# Altium PCB in.PcbDoc
Units mil, origin at the board's own origin, x right, y up, seen from the top; angles counter-clockwise.
Board outline 8000 x 11330 mil, 2 copper layers (Top Layer, Bottom Layer); 65 components, 0 nets, 187 pads, 8 vias.
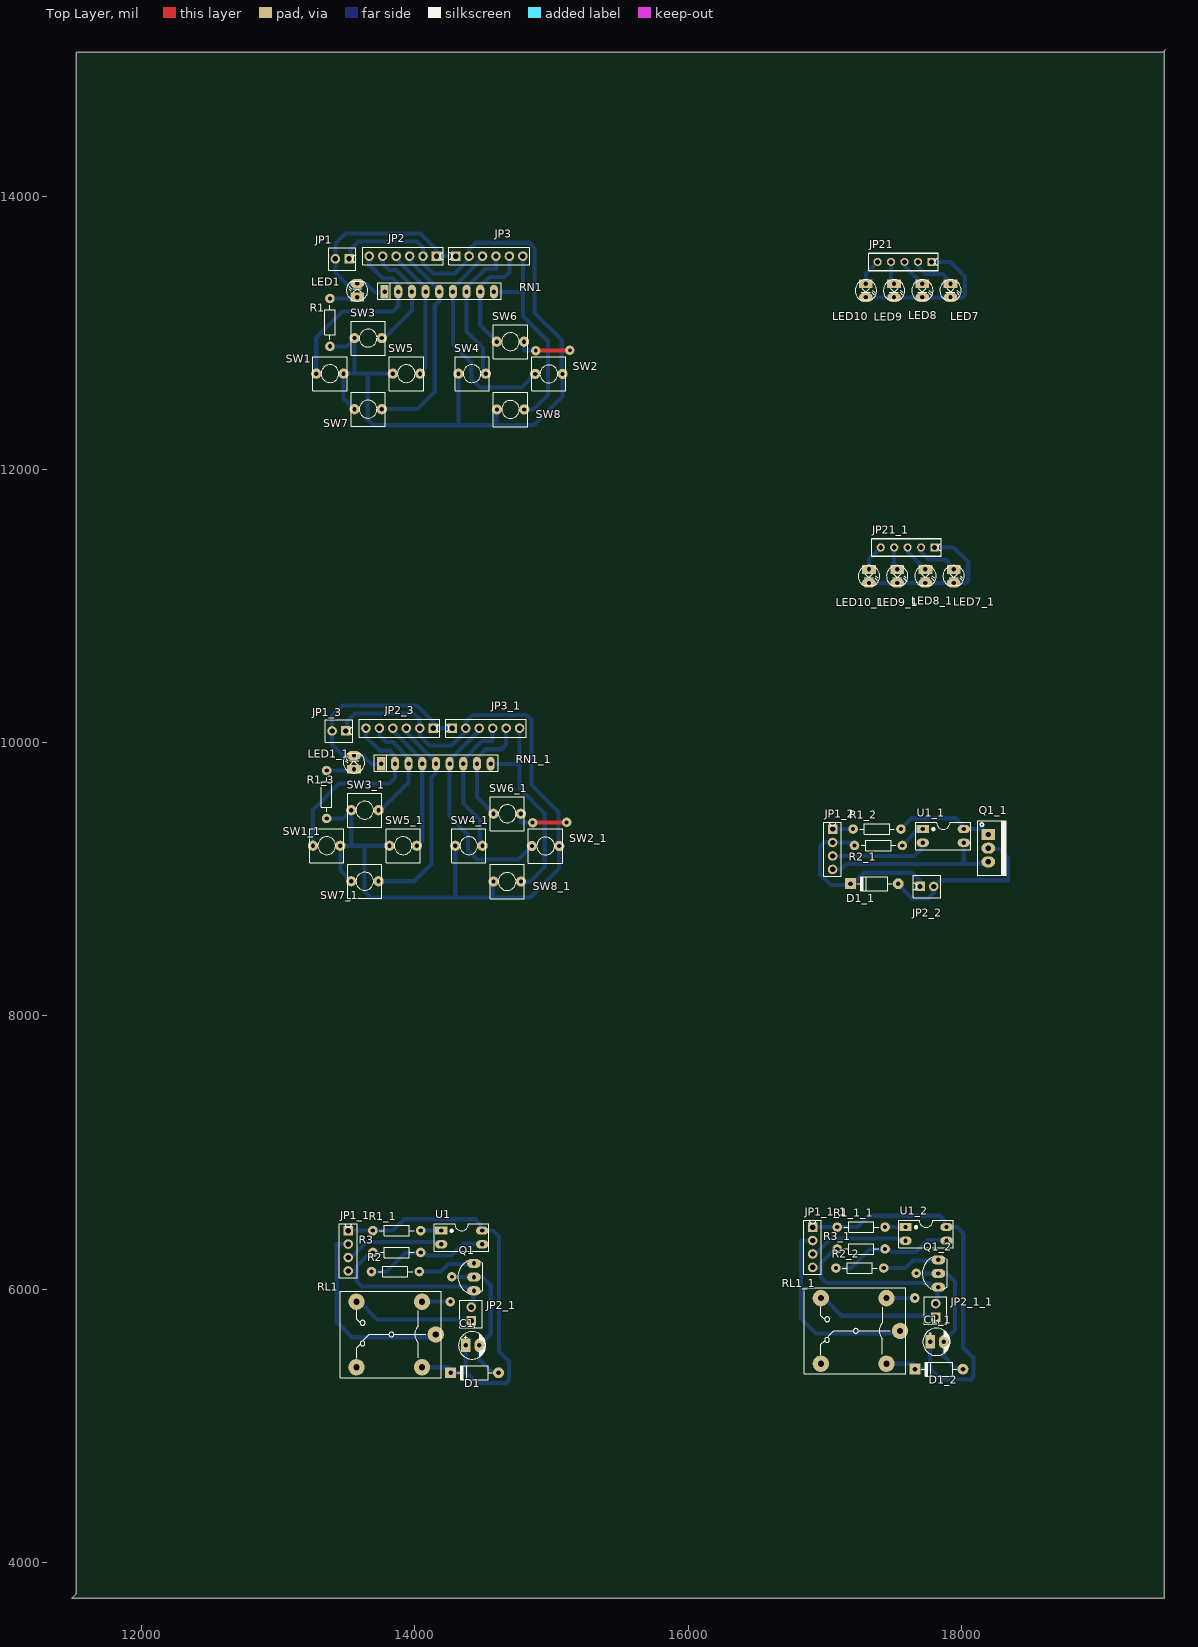
[diagram p0: Top Layer view]
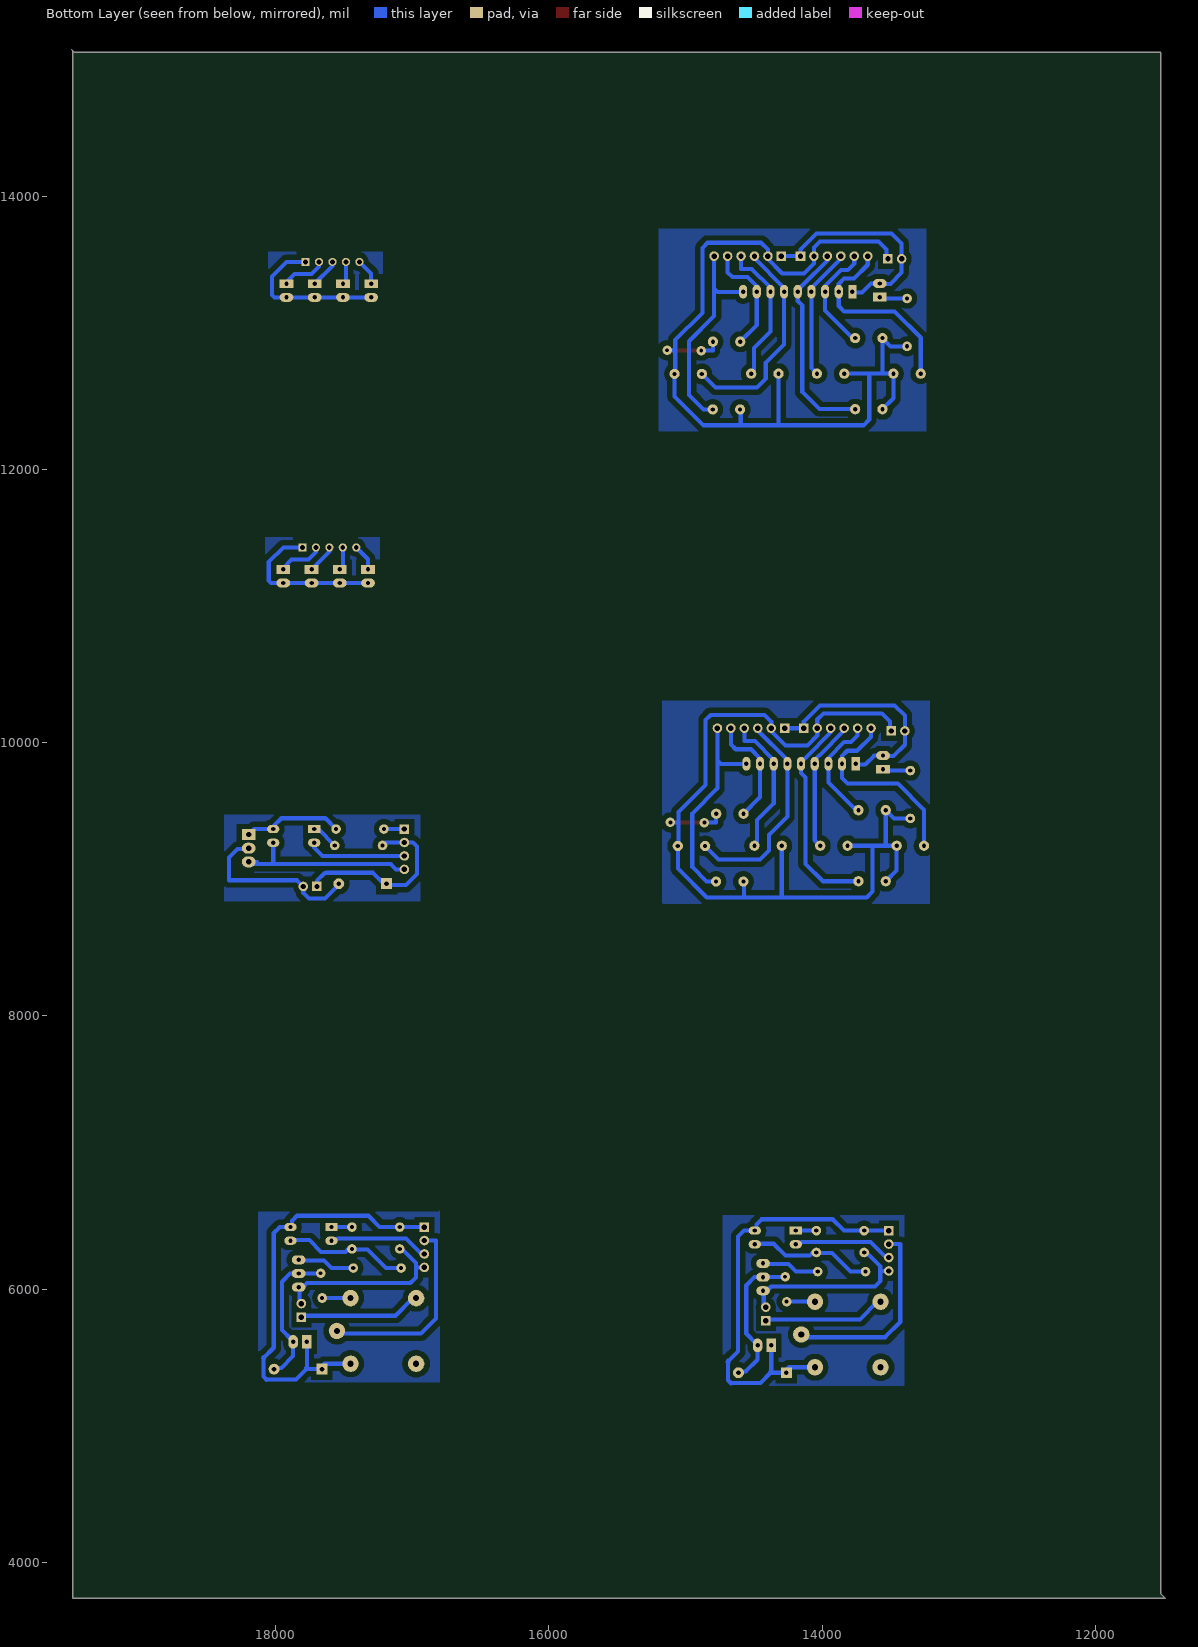
[diagram p1: Bottom Layer view, seen from below]

## Layer stack, top to bottom
Top Layer: signal copper 1.4
Dielectric: dielectric 12.6, FR-4, Dk 4.8
Bottom Layer: signal copper 1.4

## Board outline
11525,15055 19475,15055 19490,15070 19485,15065 19485,3740 11490,3740 11520,3770 11520,15045

## Design rules (kind name [scope] priority, off if disabled: settings)
Clearance [All] p1: gap=40
PolygonConnect [All] p1: connectstyle=Relief reliefconductorwidth=10 reliefentries=4 polygonreliefangle="90 Angle"
RoutingVias [All] p1: holewidth=28 width=50 viastyle="Through Hole" minholewidth=28 minwidth=50 maxholewidth=28 maxwidth=50
SilkscreenOverComponentPads [All] p1: minsilkscreentomaskgap=10
SolderMaskExpansion [All] p1: expansion=4
Width [All] p1: maxlimit=30 minlimit=30 preferedwidth=30
27 further rules are at their usual default settings.

## Components (designator, comment, footprint, x,y, rotation, side; value= is the part's Value field where it differs from the comment)
C1 "10uF" CP1/2 14372,5589 r0 top
C1_1 "10uF" CP1/2 17771,5615 r0 top (schematic designator C1)
D1 "1N4007" D1A 14612,5389 r0 top
D1_1 "1N4007" D1A 17537,8968 r0 top (schematic designator D1)
D1_2 "1N4007" D1A 18011,5415 r0 top (schematic designator D1)
JP1 "JP2" CON2 13518,13541 r270 top
JP1_1 "JP4" CON4 13512,6429 r0 top (schematic designator JP1)
JP1_1_1 "JP4" CON4 16911,6455 r0 top (schematic designator JP1)
JP1_2 "JP4" CON4 17057,9368 r0 top (schematic designator JP1)
JP1_3 "JP2" CON2 13494,10086 r270 top (schematic designator JP1)
JP2 "JP6" CON6#1 14158,13561 r270 top
JP2_1 "JP2" CON2 14412,5769 r180 top (schematic designator JP2)
JP2_1_1 "JP2" CON2 17811,5795 r180 top (schematic designator JP2)
JP2_2 "JP2" CON2 17697,8948 r90 top (schematic designator JP2)
JP2_3 "JP6" CON6#1 14134,10106 r270 top (schematic designator JP2)
JP3 "JP6" CON6#2 14298,13561 r270 top
JP3_1 "JP6" CON6#2 14274,10106 r270 top (schematic designator JP3)
JP21 "JP5" CON5 17780,13519 r270 top
JP21_1 "JP5" CON5 17803,11429 r270 top (schematic designator JP21)
LED1 "LED" LED-3 13578,13261 r90 top
LED1_1 "LED" LED-3 13554,9806 r90 top (schematic designator LED1)
LED7 "LED" LED-3 17920,13359 r270 top
LED7_1 "LED" LED-3 17943,11269 r270 top (schematic designator LED7)
LED8 "LED" LED-3 17713.33,13359 r270 top
LED8_1 "LED" LED-3 17736.33,11269 r270 top (schematic designator LED8)
LED9 "LED" LED-3 17506.67,13359 r270 top
LED9_1 "LED" LED-3 17529.67,11269 r270 top (schematic designator LED9)
LED10 "LED" LED-3 17300,13359 r270 top
LED10_1 "LED" LED-3 17323,11269 r270 top (schematic designator LED10)
Q1 "C1815" QTO-92 14432,6089 r90 top
Q1_1 "IRF840" QTO-220 18197,9328 r270 top (schematic designator Q1)
Q1_2 "C1815" QTO-92 17831,6115 r90 top (schematic designator Q1)
R1 "1k" R1/4W 13378,12901 r90 top
R1_1 "220" R1/4W 13692,6429 r0 top (schematic designator R1)
R1_1_1 "220" R1/4W 17091,6455 r0 top (schematic designator R1)
R1_2 "10K" R1/4W 17557,9368 r180 top (schematic designator R1)
R1_3 "1k" R1/4W 13354,9446 r90 top (schematic designator R1)
R2 "1K" R1/4W 14032,6129 r180 top
R2_1 "220" R1/4W 17217,9248 r0 top (schematic designator R2)
R2_2 "1K" R1/4W 17431,6155 r180 top (schematic designator R2)
R3 "1K" R1/4W 13692,6269 r0 top
R3_1 "1K" R1/4W 17091,6295 r0 top (schematic designator R3)
RL1 "Relay 10A/12V" RL_SPDT_10A 14152,5669 r180 top
RL1_1 "Relay 10A/12V" RL_SPDT_10A 17551,5695 r180 top (schematic designator RL1)
RN1 "10K" RN8 13778,13301 r0 top
RN1_1 "10K" RN8 13754,9846 r0 top (schematic designator RN1)
SW1 "SW" SW2 13478,12701 r180 top
SW1_1 "SW" SW2 13454,9246 r180 top (schematic designator SW1)
SW2 "SW" SW2 15080,12699 r180 top
SW2_1 "SW" SW2 15056,9244 r180 top (schematic designator SW2)
SW3 "SW" SW2 13558,12961 r0 top
SW3_1 "SW" SW2 13534,9506 r0 top (schematic designator SW3)
SW4 "SW" SW2 14319,12701 r0 top
SW4_1 "SW" SW2 14295,9246 r0 top (schematic designator SW4)
SW5 "SW" SW2 13838,12701 r0 top
SW5_1 "SW" SW2 13814,9246 r0 top (schematic designator SW5)
SW6 "SW" SW2 14799,12935 r180 top
SW6_1 "SW" SW2 14775,9480 r180 top (schematic designator SW6)
SW7 "SW" SW2 13558,12441 r0 top
SW7_1 "SW" SW2 13534,8986 r0 top (schematic designator SW7)
SW8 "SW" SW2 14600,12439 r0 top
SW8_1 "SW" SW2 14576,8984 r0 top (schematic designator SW8)
U1 "PC817" DIP4/W0.3 14192,6429 r270 top
U1_1 "PC817" DIP4/W0.3 17717,9368 r270 top (schematic designator U1)
U1_2 "PC817" DIP4/W0.3 17591,6455 r270 top (schematic designator U1)

## Footprints (in the part's own frame and the unit in brackets; to place one, negate y for a bottom-side part, rotate by r counter-clockwise, add the part's x,y. Pads: shape width x height; smd on the part's side, far side on the other; paste and mask are expansions set on the pad)
CON2 [mil]
  rect 70x70 hole 39.37 unplated: 1(0,0)
  round 70 hole 39.37 unplated: 2(0,-100)
  silkscreen extent -82,-150 82,50
CON4 [mil]
  rect 70x70 hole 39.37 unplated: 1(0,0)
  round 70 hole 39.37 unplated: 2(0,-98.43) 3(0,-196.85) 4(0,-295.28)
  silkscreen extent -64,-344 64,49
CON5 [mil]
  rect 60x60 hole 35: 1(0,0)
  round 60 hole 35: 2(0,-98.42) 3(0,-196.85) 4(0,-295.28) 5(0,-393.7)
  silkscreen extent -64,-460 64,49
CON6#1 [mil]
  rect 70x70 hole 39.37 unplated: 1(0,0)
  round 70 hole 39.37 unplated: 2(0,-98.43) 3(0,-196.85) 4(0,-295.28) 5(0,-393.7) 6(0,-492.13)
  silkscreen extent -64,-541 64,49
CON6#2 [mil]
  rect 70x70 hole 39.37 unplated: 1(0,0)
  round 70 hole 39.37 unplated: 2(0,98.43) 3(0,196.85) 4(0,295.28) 5(0,393.7) 6(0,492.13)
  silkscreen extent -64,-49 64,541
CP1/2 [mil] "Tu hoa < 22uF/16>50V"
  rect 70x100 hole 32: 1(0,0)
  oval 70x100 hole 32: 2(100,0)
  silkscreen extent -53,-100 147,100, body extent -49,-99 149,99, height 287
D1A [mil] "Diode 1A, W 100mil, L 350mil"
  round 80 hole 35: 1(0,0)
  rect 80x80 hole 35: 2(-350,0)
  silkscreen extent -305,-50 -45,50, body extent -386,-33 34,36, height 84
DIP4/W0.3 [mil] "4 PIN, W 300mil, Pin to pin 100mil"
  rect 60x90 hole 31: 1(0,0)
  oval 60x90 hole 31: 2(100,0) 3(100,300) 4(0,300)
  silkscreen extent -50,-50 150,350, body extent -59,-10 159,305, height 170
LED-3 [mil] "LED 2 PIN, 3ly Only colour"
  rect 65x100 hole 32: 1(0,0)
  oval 65x100 hole 32: 2(100,0)
  silkscreen extent -29,-78 118,79, body extent -13,-75 125,75, height 217
QTO-92 [mil] "TO-92"
  oval 66x100 hole 32: 1(-100,0) 2(0,0) 3(100,0)
  silkscreen extent -117,-65 120,118, body extent -109,-66 109,95, height 245
QTO-220 [mil] "TO-220 - 1-2-3"
  rect 80x100 hole 39: 1(0,0)
  oval 80x100 hole 39: 2(100,0) 3(200,0)
  silkscreen extent -100,-76 300,130, body extent -119,-64 322,121, height 755
R1/4W [mil] "R 1/4W, 2 Pin, 350mil"
  round 70 hole 31: 1(0,0) 2(350,0)
  silkscreen extent 48,-38 302,38, body extent -40,-47 386,47, height 111
RL_SPDT_10A [mil] "Relay SPDT, 5 pin, 10A,W 650mil, L 800mil, H 800mil"
  round 120 hole 45: 1(0,0) 2(580,240) 3(580,-240) 4(100,-240) 5(100,240)
  silkscreen extent -40,-315 700,315
RN8 [mil] "R SIP8, 9 Pin"
  rect 60x100 hole 32: 1(0,0)
  oval 60x100 hole 32: 2(100,0) 3(200,0) 4(300,0) 5(400,0) 6(500,0) 7(600,0) 8(700,0) 9(800,0)
  silkscreen extent -50,-55 855,65, body extent -43,-44 843,5, height 259
SW2 [mil] "SW button 2pin, 250x 250 mil"
  round 75 hole 31: 1(0,0) 2(200,0)
  silkscreen extent -25,-125 225,125

## Part data
C1 C1_1: library part CP1, "Cap P  0,1uF < 22uF , 16 - 50V"
D1 D1_1 D1_2: library part D1A, "Diode 1A"
JP1 JP1_3 JP2_1 JP2_1_1 JP2_2: library part Con2, "Connector 2"
JP1_1 JP1_1_1 JP1_2: library part Con4, "Connector 4"
JP2 JP2_3 JP3 JP3_1: library part Con6, "Connector 6"
JP21 JP21_1: library part Con5, "Connector 5"
LED1 LED1_1 LED7 LED7_1 LED8 LED8_1 LED9 LED9_1 LED10 LED10_1: "LED Single colour Green and Red"
Q1 Q1_2: "NPN 600mW, ECB"
Q1_1: "MOSFET N - CHANNEL 500V - 0.75 - 8A - TO-220"
R1 R1_1 R1_1_1 R1_2 R1_3 R2 R2_1 R2_2 R3 R3_1: library part R1/4W, "Resistor 1/4W"
RL1 RL1_1: library part "Relay 1", "Relay SPDT,10A - 12VDC 5 Pin"
RN1 RN1_1: library part RN8, "Resistor 8 (Thanh)"
SW1 SW1_1 SW2 SW2_1 SW3 SW3_1 SW4 SW4_1 SW5 SW5_1 SW6 SW6_1 SW7 SW7_1 SW8 SW8_1: library part SW2, "Switch button 2 pin"
U1 U1_1 U1_2: "Single Opto"

## Via types
v1: diameter 70, hole 28, Top Layer to Bottom Layer, 8 vias

## Nets (pads, with @x,y where several pads share a name; then routed paths per layer and width w, separated by ;. In a path a pad name is that pad's centre, name@x,y a point inside that pad or via, vN(x,y) a via of type N, cw(c..) or ccw(c..) an arc to the next point about the centre after c; other vN are vias at no path point)
pads on no net: C1.1 C1.2 C1_1.1 C1_1.2 D1.1 D1.2 D1_1.1 D1_1.2 D1_2.1 D1_2.2 JP1.1 JP1.2 JP1_1.1 JP1_1.2 JP1_1.3 JP1_1.4 JP1_1_1.1 JP1_1_1.2 JP1_1_1.3 JP1_1_1.4 JP1_2.1 JP1_2.2 JP1_2.3 JP1_2.4 JP1_3.1 JP1_3.2 JP2.1 JP2.2 JP2.3 JP2.4 JP2.5 JP2.6 JP2_1.1 JP2_1.2 JP2_1_1.1 JP2_1_1.2 JP2_2.1 JP2_2.2 JP2_3.1 JP2_3.2 JP2_3.3 JP2_3.4 JP2_3.5 JP2_3.6 JP3.1 JP3.2 JP3.3 JP3.4 JP3.5 JP3.6 JP3_1.1 JP3_1.2 JP3_1.3 JP3_1.4 JP3_1.5 JP3_1.6 JP21.1 JP21.2 JP21.3 JP21.4 JP21.5 JP21_1.1 JP21_1.2 JP21_1.3 JP21_1.4 JP21_1.5 LED1.1 LED1.2 LED1_1.1 LED1_1.2 LED7.1 LED7.2 LED7_1.1 LED7_1.2 LED8.1 LED8.2 LED8_1.1 LED8_1.2 LED9.1 LED9.2 LED9_1.1 LED9_1.2 LED10.1 LED10.2 LED10_1.1 LED10_1.2 Q1.1 Q1.2 Q1.3 Q1_1.1 Q1_1.2 Q1_1.3 Q1_2.1 Q1_2.2 Q1_2.3 R1.1 R1.2 R1_1.1 R1_1.2 R1_1_1.1 R1_1_1.2 R1_2.1 R1_2.2 R1_3.1 R1_3.2 R2.1 R2.2 R2_1.1 R2_1.2 R2_2.1 R2_2.2 R3.1 R3.2 R3_1.1 R3_1.2 RL1.1 RL1.2 RL1.3 RL1.4 RL1.5 RL1_1.1 RL1_1.2 RL1_1.3 RL1_1.4 RL1_1.5 RN1.1 RN1.2 RN1.3 RN1.4 RN1.5 RN1.6 RN1.7 RN1.8 RN1.9 RN1_1.1 RN1_1.2 RN1_1.3 RN1_1.4 RN1_1.5 RN1_1.6 RN1_1.7 RN1_1.8 RN1_1.9 SW1.1 SW1.2 SW1_1.1 SW1_1.2 SW2.1 SW2.2 SW2_1.1 SW2_1.2 SW3.1 SW3.2 SW3_1.1 SW3_1.2 SW4.1 SW4.2 SW4_1.1 SW4_1.2 SW5.1 SW5.2 SW5_1.1 SW5_1.2 SW6.1 SW6.2 SW6_1.1 SW6_1.2 SW7.1 SW7.2 SW7_1.1 SW7_1.2 SW8.1 SW8.2 SW8_1.1 SW8_1.2 U1.1 U1.2 U1.3 U1.4 U1_1.1 U1_1.2 U1_1.3 U1_1.4 U1_2.1 U1_2.2 U1_2.3 U1_2.4
copper on no net: | length 67795.9
  Top Layer w30: v1(14861,9415) 15108,9415 v1(15110,9417) ; v1(14885,12870) 15132,12870 v1(15134,12872)
  Bottom Layer w30: 13254,9246 13254,9509 13446,9701 13814,9701 13854,9741 13854,9846 13854,9903 13816,9941 13743.85,9941 13641.87,10042.98 13641.87,10106 ; 13278,12701 13278,12964 13470,13156 13838,13156 13878,13196 13878,13301 13878,13358 13840,13396 13767.85,13396 13665.87,13497.98 13665.87,13561 ; 13354,9446 13474,9446 13534,9506 13534,9250 13530,9246 ; 13354,9796 13544,9796 13554,9806 ; 13378,12901 13498,12901 13558,12961 13558,12705 13554,12701 ; 13378,13251 13568,13251 13578,13261 ; 13494,10086 13504,10096 13504,10154 13563,10213 13991,10213 14035.57,10168.43 14035.57,10106 14035.57,10052.43 14108,9980 14267.5,9980 14372.43,10084.93 14372.43,10106 14372.43,10154.43 14422,10204 14815,10204 14852,10167 14852,9691 15051,9492 15051,9417 ; 13512,6133.72 13542.72,6133.72 13574,6133.72 ; 13512,6232.15 13531.15,6232.15 13645,6346 14149,6346 14160,6335 ; 13512,6330.57 13428,6330.57 13428,5759 13538,5649 14123,5649 14136,5662 ; 13512,6429 13692,6429 13703,6429 ; 13518,13541 13528,13551 13528,13609 13587,13668 14015,13668 14059.57,13623.43 14059.57,13561 14059.57,13507.43 14132,13435 14291.5,13435 14396.43,13539.93 14396.43,13561 14396.43,13609.43 14446,13659 14839,13659 14876,13622 14876,13146 15075,12947 15075,12872 ; 13534,8986 13454,9066 13454,9120 13454,9246 13530,9246 ; 13558,12441 13478,12521 13478,12575 13478,12701 13554,12701 ; 13572,5909 13595,5909 13724,5780 14386,5780 14389,5783 ; 13682,6129 13793,6129 13928,6264 14034,6264 ; 13688,6256 13690,6258 ; 13695,6253 13661,6253 13574,6166 13574,6133.72 ; 13702,6430 13703,6429 ; 13726,6021 13731,6021 ; 13734,8986 13994,8986 14121,9113 14121,9746 14154,9779 14154,9846 14154,9857.92 14119,9892.92 13937.15,10074.77 13937.15,10106 ; 13734,9506 13752,9506 13954,9708 13954,9846 13954,9888 13838,10004 13788,10004 13740.3,10051.7 13740.3,10106 ; 13754,9846 13748,9840 13684,9840 13618,9906 13554,9906 13551,9903 13476,9903 13394,9985 13394,10086 13394,10198 13469,10273 14015.85,10273 14134,10154.85 14134,10106 14274,10106 ; 13758,12441 14018,12441 14145,12568 14145,13201 14178,13234 14178,13301 14178,13312.92 14143,13347.92 13961.15,13529.77 13961.15,13561 ; 13758,12961 13776,12961 13978,13163 13978,13301 13978,13343 13862,13459 13812,13459 13764.3,13506.7 13764.3,13561 ; 13778,13301 13772,13295 13708,13295 13642,13361 13578,13361 13575,13358 13500,13358 13418,13440 13418,13541 13418,13653 13493,13728 14039.85,13728 14158,13609.85 14158,13561 14298,13561 ; 13814,9246 13631,9246 ; 13838,12701 13655,12701 ; 13838.72,10106 13838.72,10088.13 14016.93,9909.93 14029,9897.85 14054,9872.85 14054,9846 14054,9286 14014,9246 ; 13862.72,13561 13862.72,13543.13 14040.93,13364.93 14053,13352.85 14078,13327.85 14078,13301 14078,12741 14038,12701 ; 14032,6129 14190,6129 14246,6185 14310,6185 14332,6185 14400,6185 ; 14042,6269 14069,6269 14090,6248 14269,6248 14354,6333 14462,6333 ; 14042,6429 14192,6429 14198,6423 ; 14052,5429 14243,5429 14263,5409 14263,5404 ; 14132,5909 14052,5909 14255,5909 v1@14259,5913 ; 14262,5389 14376,5389 ; v1(14271,6091) 14273,6089 14432,6089 14495,6089 14555,6029 14555,5677 14486,5608 ; 14295,9246 14295,8868 ; 14319,12701 14319,12323 ; 14372,5477 14372,5589 14372,5401 14376,5397 ; 14377,5396 14376,5397 ; 14405,5988 14401,5992 ; 14406,5992 14401,5992 ; 14412,5869 14427,5884 14427,6003 ; 14467.5,6327.5 14468,6328 14475,6328 ; 14470.85,10106 14470.85,10090.85 14254,9874 14254,9846 14254,9755 14254,9460 14388,9326 14388,9211 14454,9145 14757,9145 14856,9244 ; 14472,5589 14472,5484 14559,5397 14628,5397 ; 14484,6441 14481,6444 14481,6475 14444,6512 13922,6512 13839,6429 13703,6429 ; 14492,6429 14498.92,6429 14570,6429 14614,6385 14614,5546 14689,5471 ; 14494.85,13561 14494.85,13545.85 14278,13329 14278,13301 14278,13210 14278,12915 14412,12781 14412,12666 14478,12600 14781,12600 14880,12699 ; 14495,9246 14475,9266 14475,9433 14354,9554 14354,9846 14354,9875 14491,10012 14568,10012 14569.28,10013.28 14569.28,10106 ; 14519,12701 14499,12721 14499,12888 14378,13009 14378,13301 14378,13330 14515,13467 14592,13467 14593.28,13468.28 14593.28,13561 ; 14535,5314 14587,5314 ; 14554,9846 14556,9844 14740,9844 14766.13,9870.13 ; 14575,9480 14454,9601 14454,9846 14454,9885 14521,9952 14632,9952 14667.7,9987.7 14667.7,10106 ; 14576,8984 14571,8979 14571,8868 ; 14578,13301 14580,13299 14764,13299 14790.13,13325.13 ; 14599,12935 14478,13056 14478,13301 14478,13340 14545,13407 14656,13407 14691.7,13442.7 14691.7,13561 ; 14600,12439 14595,12434 14595,12323 ; 14663.07,5314 14587,5314 ; 14666,5315.93 14666,5311 14689,5334 14689,5467 ; 14687,5465 14689,5467 ; 14689,5477 14689,5471 ; 14766.13,10066 14766.13,9870.13 ; 14775,9480 14775,9415 v1(14861,9415) v1@14867,9421 ; 14776,8984 14845,8984 14950,9089 14950,9483 14766.13,9666.87 14766.13,9870.13 ; 14790.13,13521 14790.13,13325.13 ; 14799,12935 14799,12870 v1(14885,12870) v1@14891,12876 ; 14800,12439 14869,12439 14974,12544 14974,12938 14790.13,13121.87 14790.13,13325.13 ; v1(15110,9417) 15051,9417 ; v1(15134,12872) 15075,12872 ; 16911,6159.72 16941.72,6159.72 16973,6159.72 ; 16911,6258.15 16930.15,6258.15 17044,6372 17548,6372 17559,6361 ; 16911,6356.57 16827,6356.57 16827,5785 16937,5675 17522,5675 17535,5688 ; 16911,6455 17091,6455 17102,6455 ; 16971,5935 16994,5935 17123,5806 17785,5806 17788,5809 ; 17057,9072.72 17117.72,9072.72 17157,9112 18018,9112 ; 17057,9171.15 17655.15,9171.15 17717,9233 17717,9268 ; 17057,9368 17207,9368 ; 17081,6155 17192,6155 17327,6290 17433,6290 ; 17087,6282 17089,6284 ; 17094,6279 17060,6279 16973,6192 16973,6159.72 ; 17101,6456 17102,6455 ; 17125,6047 17130,6047 ; 17217,9248 17195.43,9269.57 17057,9269.57 16995.57,9269.57 16966,9240 16966,9039 17046,8959 17178,8959 17187,8968 17208,8968 17288,9048 17626,9048 17627,9047 17640,9047 17697,8990 17697,8948 ; 17300,13259 17506.67,13259 17713.33,13259 17920,13259 18009,13259 18027,13277 18027,13412 17920,13519 17780,13519 ; 17300,13359 17300,13432.7 17386.3,13519 ; 17323,11169 17529.67,11169 17736.33,11169 17943,11169 18032,11169 18050,11187 18050,11322 17943,11429 17803,11429 ; 17323,11269 17323,11342.7 17409.3,11429 ; 17431,6155 17589,6155 17645,6211 17709,6211 17731,6211 17799,6211 ; 17441,6295 17468,6295 17489,6274 17668,6274 17753,6359 17861,6359 ; 17441,6455 17591,6455 17597,6449 ; 17451,5455 17642,5455 17662,5435 17662,5430 ; 17484.72,13519 17484.72,13380.94 17506.67,13359 ; 17507.72,11429 17507.72,11290.94 17529.67,11269 ; 17531,5935 17451,5935 17654,5935 v1@17658,5939 ; 17537,8968 17537,8961 17638,8860 17756,8860 17797,8901 17797,8948 ; 17557,9368 17636,9447 17958,9447 18017,9388 18017,9368 18157,9368 18197,9328 ; 17567,9248 17687,9368 17717,9368 ; 17583.15,13519 17583.15,13489.18 17713.33,13359 ; 17606.15,11429 17606.15,11399.18 17736.33,11269 ; 17661,5415 17775,5415 ; v1(17670,6117) 17672,6115 17831,6115 17894,6115 17954,6055 17954,5703 17885,5634 ; 17681.58,13519 17681.58,13485.42 17737,13430 17860,13430 17920,13370 17920,13359 ; 17704.58,11429 17704.58,11395.42 17760,11340 17883,11340 17943,11280 17943,11269 ; 17771,5503 17771,5615 17771,5427 17775,5423 ; 17776,5422 17775,5423 ; 17802,8943 17797,8948 ; 17804,6014 17800,6018 ; 17805,6018 17800,6018 ; 17811,5895 17826,5910 17826,6029 ; 17866.5,6353.5 17867,6354 17874,6354 ; 17871,5615 17871,5510 17958,5423 18027,5423 ; 17883,6467 17880,6470 17880,6501 17843,6538 17321,6538 17238,6455 17102,6455 ; 17891,6455 17897.92,6455 17969,6455 18013,6411 18013,5572 18088,5497 ; 17934,5340 17986,5340 ; 18017,9246 18017,9268 18017,9113 18018,9112 ; 18062.07,5340 17986,5340 ; 18065,5341.93 18065,5337 18088,5360 18088,5493 ; 18086,5491 18088,5493 ; 18088,5503 18088,5497 ; 18135,9128 18197,9128 18181,9112 18018,9112 ; 18197,9228 18202,9223 18278,9223 18342,9159 18342,8993 17988,8993 17842,8993 17797,8948 ; 13530,9246 13631,9246 ; 13554,12701 13655,12701 ; 13574,6133.72 13574,6059 13608,6025 13609,6025 13613,6021 13731,6021 ; 13631,9246 13631,8910 13673,8868 14295,8868 ; 13655,12701 13655,12365 13697,12323 14319,12323 ; 13731,6021 14322,6021 14338,6021 14372,6021 14401,5992 ; 14295,8868 14571,8868 ; 14319,12323 14595,12323 ; 14376,5389 14376,5397 ; 14376,5389 14451,5314 14587,5314 ; 14571,8868 14844,8868 15056,9080 15056,9244 15051,9249 15051,9417 ; 14595,12323 14868,12323 15080,12535 15080,12699 15075,12704 15075,12872 ; 14689,5467 14691,5469 14689,5471 ; 14689,5467 14689,5471 ; 16973,6159.72 16973,6085 17007,6051 17008,6051 17012,6047 17130,6047 ; 17130,6047 17721,6047 17737,6047 17771,6047 17800,6018 ; 17775,5415 17850,5340 17986,5340 ; 17775,5415 17775,5423 ; 18088,5493 18088,5497 ; 18088,5493 18090,5495 18088,5497
  other v1: 14260,5910 17659,5936

## Polygon pours and split planes (outlines as drawn)
no net on Bottom Layer "Bottom Layer-No Net" (solid, pour order 1000): 17237,11503 18075,11503 18075,11127 18073,11125 17238,11125 17238,11502 17237,11503
no net on Bottom Layer "Bottom Layer-No Net" (solid, pour order 1000): 16799,6569 18126,6569 18126,5312 18119,5319 16799,5319 16799,6577 16802,6580 16805,6577 16806,6577
no net on Bottom Layer "Bottom Layer-No Net" (solid, pour order 1000): 13212,10308 15170,10308 15170,8827 15166,8823 13212,8823 13212,10308
no net on Bottom Layer "Bottom Layer-No Net" (solid, pour order 1000): 16940,9474 18374,9474 18377,9471 18377,8839 16940,8839 16940,9474
no net on Bottom Layer "Bottom Layer-No Net" (solid, pour order 1000): 13400,6543 14727,6543 14727,5286 14720,5293 13400,5293 13400,6551 13403,6554 13406,6551 13407,6551
no net on Bottom Layer "Bottom Layer-No Net" (solid, pour order 1000): 17214,13593 18052,13593 18052,13217 18050,13215 17215,13215 17215,13592 17214,13593
no net on Bottom Layer "Bottom Layer-No Net" (solid, pour order 1000): 13236,13763 15194,13763 15194,12282 15190,12278 13236,12278 13236,13763